# Altium PCB R45_PCBM.PcbDoc (part 5 of 8)
Units mm, origin at the board's own origin, x right, y up, seen from the top; angles counter-clockwise.
Board outline 109 x 109 mm, 4 copper layers (Top Layer, Layer 1, Layer 2, Bottom Layer), stack 0.98 mm thick; 9 components, 0 nets, 14 pads, 1504 vias.
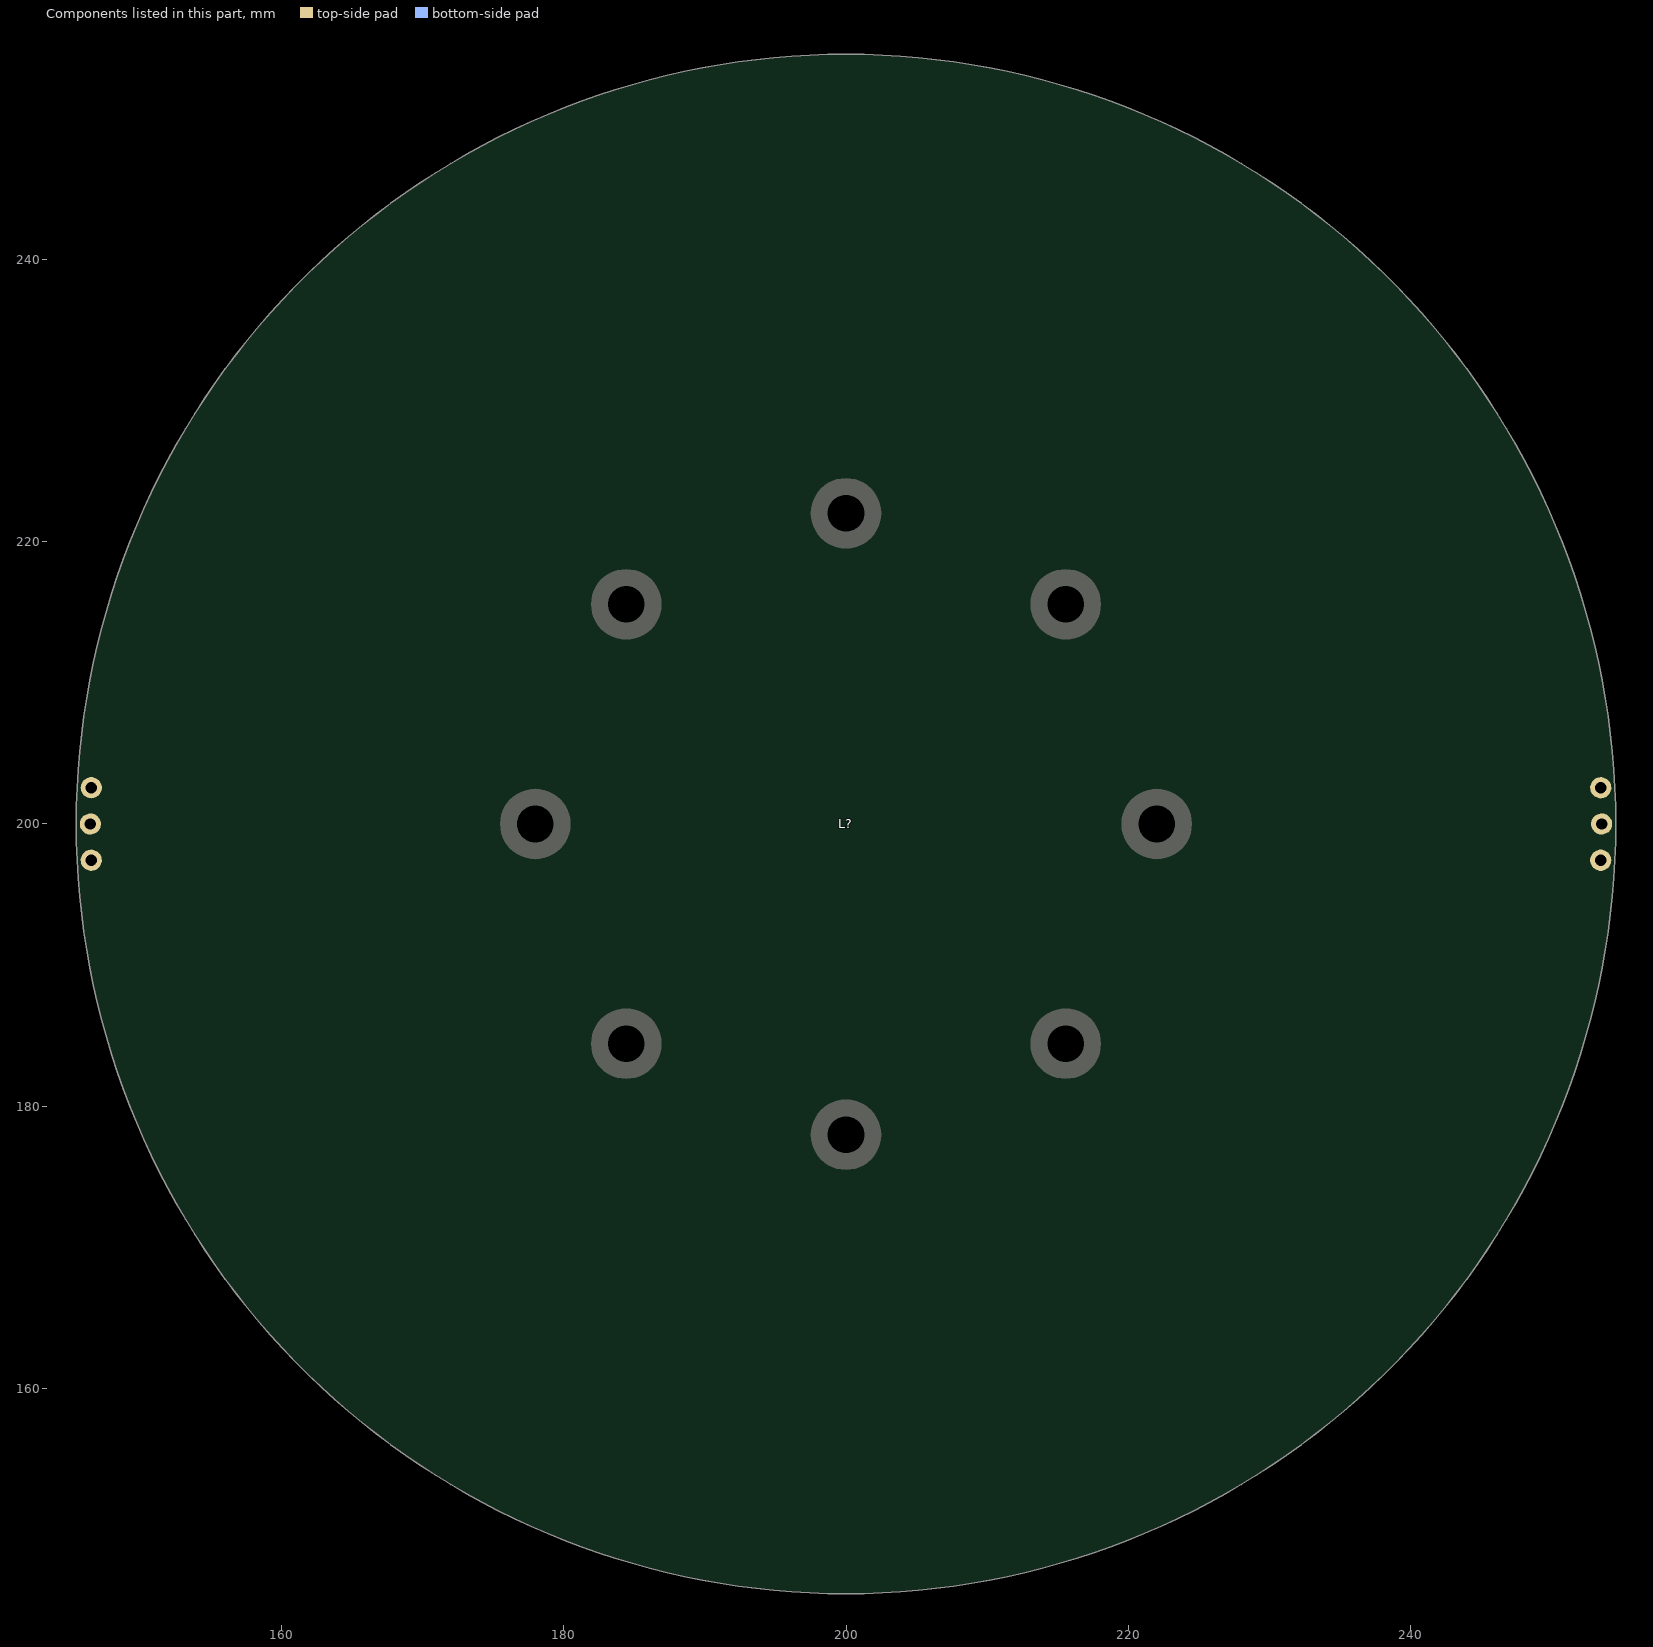
[diagram p7: the components of this part, seen from the top]

## Footprints (in the part's own frame and the unit in brackets; to place one, negate y for a bottom-side part, rotate by r counter-clockwise, add the part's x,y. Pads: shape width x height; smd on the part's side, far side on the other; paste and mask are expansions set on the pad) (continued)
R45_stator [mm] (continued)
  Layer 2 region: -33.629,35.508 -33.58,35.539 -33.522,35.549 -33.464,35.535 -33.416,35.501 -33.416,35.501 -18.566,19.566 -18.531,19.503 -18.529,19.43 -18.562,19.366 -18.562,19.366 -21.761,15.686 -21.82,15.645 -21.892,15.636 -21.96,15.662 -21.96,15.662 -37.424,26.484 -37.465,26.527 -37.486,26.582 -37.484,26.641 -37.46,26.695 -37.46,26.695 -36.964,27.377 -36.92,27.417 -36.865,27.437 -36.806,27.434 -36.752,27.409 -36.752,27.409 -23.3,17.266 -23.136,17.187 -22.954,17.176 -22.782,17.236 -22.647,17.358 -22.647,17.358 -22.494,17.493 -22.301,17.557 -22.098,17.541 -21.917,17.447 -21.917,17.447 -21.863,17.403 -21.724,17.341 -21.573,17.354 -21.447,17.44 -21.447,17.44 -20.255,18.812 -20.188,18.948 -20.195,19.099 -20.277,19.228 -20.277,19.228 -20.328,19.275 -20.446,19.441 -20.49,19.64 -20.453,19.841 -20.341,20.01 -20.341,20.01 -20.239,20.162 -20.204,20.34 -20.239,20.519 -20.34,20.67 -20.34,20.67 -33.499,33.821 -33.596,33.886 -33.711,33.909 -33.826,33.886 -33.923,33.821 -33.923,33.821 -35.599,32.053 -37.182,30.202 -37.182,30.202 -37.236,30.099 -37.247,29.982 -37.213,29.87 -37.138,29.78 -37.138,29.78 -22.798,18.161 -22.753,18.099 -22.744,18.023 -22.774,17.952 -22.774,17.952 -22.929,17.755 -22.99,17.708 -23.066,17.698 -23.137,17.727 -23.137,17.727 -38.799,29.523 -38.839,29.566 -38.858,29.622 -38.854,29.681 -38.828,29.734 -38.828,29.734 -36.344,32.724 -33.629,35.508
  Layer 2 region: -33.799,33.262 -33.75,33.295 -33.693,33.307 -33.635,33.296 -33.586,33.263 -33.586,33.263 -20.775,20.445 -20.736,20.378 -20.735,20.302 -20.773,20.234 -20.773,20.234 -20.947,20.054 -21.013,20.014 -21.09,20.012 -21.157,20.048 -21.157,20.048 -33.607,31.652 -33.707,31.713 -33.822,31.732 -33.936,31.705 -34.031,31.636 -34.031,31.636 -34.53,31.091 -35.02,30.538 -35.02,30.538 -35.079,30.436 -35.094,30.32 -35.063,30.207 -34.991,30.115 -34.991,30.115 -22.152,18.947 -22.101,18.918 -22.043,18.911 -21.987,18.926 -21.94,18.962 -21.94,18.962 -21.831,19.088 -21.802,19.139 -21.795,19.197 -21.81,19.253 -21.846,19.3 -21.846,19.3 -34.451,30.251 -34.487,30.298 -34.502,30.355 -34.494,30.413 -34.464,30.464 -34.464,30.464 -33.9,31.091 -33.852,31.126 -33.795,31.14 -33.736,31.131 -33.686,31.1 -33.686,31.1 -20.812,19.088 -20.771,19.024 -20.767,18.948 -20.801,18.88 -20.801,18.88 -21.591,17.971 -21.654,17.928 -21.73,17.921 -21.799,17.953 -21.799,17.953 -36.592,29.925 -36.629,29.97 -36.647,30.026 -36.641,30.085 -36.613,30.137 -36.613,30.137 -35.241,31.731 -33.799,33.262
  Layer 2 region: -1.184,45.983 -2.027,45.954 -2.084,45.94 -2.132,45.905 -2.163,45.854 -2.171,45.796 -2.171,45.796 -1.292,29.119 -1.269,29.046 -1.212,28.994 -1.137,28.977 -1.137,28.977 -0.887,28.985 -0.813,29.008 -0.76,29.063 -0.742,29.138 -0.742,29.138 -1.029,45.836 -1.041,45.894 -1.075,45.942 -1.125,45.973 -1.184,45.983
  Layer 2 region: -4.511,47.206 -4.452,47.2 -4.401,47.172 -4.364,47.126 -4.347,47.07 -4.347,47.07 -2.773,29.015 -2.786,28.94 -2.835,28.88 -2.906,28.853 -2.906,28.853 -3.156,28.827 -3.232,28.839 -3.292,28.886 -3.321,28.958 -3.321,28.958 -5.399,45.849 -5.436,45.96 -5.513,46.049 -5.617,46.101 -5.734,46.11 -5.734,46.11 -6.467,46.013 -7.198,45.904 -7.198,45.904 -7.308,45.864 -7.394,45.784 -7.443,45.678 -7.447,45.561 -7.447,45.561 -4.79,28.754 -4.77,28.699 -4.73,28.656 -4.677,28.631 -4.619,28.629 -4.619,28.629 -4.454,28.655 -4.399,28.675 -4.356,28.715 -4.332,28.768 -4.33,28.827 -4.33,28.827 -6.946,45.318 -6.944,45.377 -6.919,45.431 -6.875,45.47 -6.819,45.49 -6.819,45.49 -5.984,45.607 -5.925,45.604 -5.872,45.578 -5.833,45.533 -5.814,45.477 -5.814,45.477 -3.673,28 -3.683,27.925 -3.729,27.864 -3.799,27.834 -3.799,27.833 -4.988,27.645 -5.064,27.653 -5.126,27.696 -5.159,27.765 -5.159,27.765 -8.795,46.445 -8.795,46.503 -8.772,46.558 -8.73,46.599 -8.676,46.621 -8.676,46.621 -6.6,46.96 -4.511,47.206
  Layer 2 region: -2.938,48.817 -2.88,48.809 -2.829,48.779 -2.794,48.732 -2.779,48.675 -2.779,48.675 -1.645,26.922 -1.659,26.851 -1.705,26.795 -1.771,26.766 -1.771,26.766 -6.587,26.004 -6.659,26.01 -6.72,26.05 -6.755,26.113 -6.755,26.113 -11.645,44.344 -11.649,44.403 -11.63,44.459 -11.59,44.503 -11.537,44.528 -11.537,44.528 -10.718,44.732 -10.659,44.735 -10.604,44.714 -10.56,44.674 -10.536,44.62 -10.536,44.62 -6.751,28.203 -6.676,28.037 -6.543,27.913 -6.373,27.848 -6.191,27.854 -6.191,27.854 -5.987,27.859 -5.798,27.784 -5.652,27.642 -5.574,27.453 -5.574,27.453 -5.561,27.385 -5.495,27.248 -5.371,27.161 -5.22,27.146 -5.22,27.146 -3.424,27.43 -3.285,27.491 -3.194,27.612 -3.174,27.763 -3.174,27.763 -3.182,27.832 -3.166,28.035 -3.072,28.216 -2.915,28.346 -2.719,28.404 -2.719,28.404 -2.544,28.454 -2.402,28.568 -2.315,28.728 -2.295,28.909 -2.295,28.909 -3.922,47.441 -3.954,47.554 -4.028,47.645 -4.131,47.701 -4.247,47.714 -4.247,47.714 -6.667,47.436 -9.069,47.036 -9.069,47.036 -9.178,46.992 -9.261,46.91 -9.306,46.802 -9.307,46.684 -9.307,46.684 -5.79,28.566 -5.796,28.49 -5.838,28.426 -5.906,28.391 -5.906,28.391 -6.152,28.339 -6.229,28.343 -6.293,28.384 -6.329,28.452 -6.329,28.452 -10.745,47.555 -10.747,47.614 -10.726,47.669 -10.686,47.712 -10.632,47.736 -10.632,47.736 -6.806,48.429 -2.938,48.817
  Layer 2 region: 0.507,50.696 0.564,50.684 0.613,50.651 0.644,50.601 0.655,50.543 0.655,50.543 0.216,25.819 0.199,25.752 0.154,25.699 0.09,25.673 0.09,25.673 -8.019,24.389 -8.088,24.394 -8.147,24.43 -8.184,24.488 -8.184,24.488 -14.71,43.423 -14.718,43.482 -14.703,43.539 -14.666,43.586 -14.615,43.615 -14.615,43.615 -13.813,43.875 -13.754,43.882 -13.697,43.866 -13.651,43.829 -13.623,43.777 -13.623,43.777 -8.702,27.664 -8.615,27.503 -8.474,27.388 -8.3,27.336 -8.119,27.354 -8.119,27.354 -7.916,27.374 -7.722,27.312 -7.567,27.18 -7.476,26.998 -7.476,26.998 -7.136,25.726 -7.065,25.599 -6.943,25.52 -6.799,25.508 -6.799,25.508 -1.416,26.36 -1.283,26.417 -1.191,26.53 -1.164,26.672 -1.164,26.672 -1.233,27.986 -1.203,28.188 -1.096,28.362 -0.93,28.48 -0.731,28.524 -0.731,28.524 -0.553,28.563 -0.404,28.666 -0.305,28.82 -0.273,28.999 -0.273,28.999 -0.633,49.29 -0.658,49.404 -0.724,49.5 -0.823,49.564 -0.938,49.584 -0.938,49.584 -6.902,49.111 -12.765,47.922 -12.765,47.922 -12.87,47.871 -12.948,47.783 -12.985,47.672 -12.978,47.555 -12.978,47.555 -7.769,28.093 -7.769,28.016 -7.807,27.949 -7.873,27.91 -7.873,27.91 -8.114,27.841 -8.191,27.839 -8.258,27.876 -8.299,27.941 -8.299,27.941 -14.561,48.405 -14.567,48.463 -14.55,48.52 -14.513,48.565 -14.461,48.593 -14.461,48.593 -7.056,50.205 0.507,50.696
  Layer 2 region: -16.84,42.805 -17.622,42.489 -17.671,42.457 -17.704,42.407 -17.715,42.349 -17.703,42.291 -17.703,42.291 -11.174,26.921 -11.127,26.86 -11.056,26.831 -10.979,26.84 -10.979,26.84 -10.747,26.934 -10.685,26.98 -10.655,27.051 -10.663,27.127 -10.663,27.127 -16.643,42.72 -16.675,42.77 -16.724,42.804 -16.781,42.816 -16.84,42.805
  Layer 2 region: -20.384,42.816 -20.327,42.831 -20.269,42.822 -20.219,42.792 -20.184,42.744 -20.184,42.744 -12.529,26.317 -12.516,26.241 -12.541,26.169 -12.599,26.119 -12.599,26.119 -12.825,26.009 -12.9,25.994 -12.973,26.018 -13.024,26.076 -13.024,26.076 -20.755,41.237 -20.828,41.329 -20.93,41.386 -21.046,41.4 -21.159,41.368 -21.159,41.368 -21.814,41.026 -22.464,40.674 -22.464,40.674 -22.553,40.599 -22.607,40.494 -22.617,40.378 -22.581,40.266 -22.581,40.266 -14.336,25.381 -14.298,25.337 -14.246,25.31 -14.188,25.305 -14.132,25.323 -14.132,25.323 -13.986,25.404 -13.942,25.441 -13.915,25.493 -13.91,25.552 -13.928,25.607 -13.928,25.607 -22.027,40.209 -22.045,40.266 -22.04,40.325 -22.012,40.377 -21.966,40.414 -21.966,40.414 -21.222,40.81 -21.165,40.827 -21.106,40.821 -21.054,40.792 -21.018,40.746 -21.018,40.746 -13.028,25.055 -13.012,24.981 -13.034,24.908 -13.089,24.856 -13.089,24.856 -14.143,24.272 -14.216,24.253 -14.29,24.273 -14.344,24.326 -14.344,24.326 -24.15,40.635 -24.17,40.691 -24.167,40.749 -24.142,40.803 -24.098,40.842 -24.098,40.842 -22.263,41.87 -20.384,42.816
  Layer 2 region: -16.863,47.812 -16.805,47.82 -16.748,47.806 -16.701,47.77 -16.671,47.719 -16.671,47.719 -8.627,24.336 -8.62,24.267 -8.645,24.202 -8.696,24.156 -8.696,24.156 -15.877,20.175 -15.943,20.157 -16.011,20.17 -16.066,20.212 -16.066,20.212 -28.675,35.773 -28.702,35.826 -28.707,35.885 -28.689,35.941 -28.65,35.986 -28.65,35.986 -27.986,36.505 -27.933,36.532 -27.874,36.536 -27.818,36.517 -27.774,36.477 -27.774,36.477 -17.638,23.019 -17.503,22.898 -17.331,22.838 -17.149,22.848 -16.985,22.928 -16.985,22.928 -16.801,23.015 -16.597,23.024 -16.406,22.953 -16.259,22.813 -16.259,22.813 -15.504,21.734 -15.395,21.639 -15.253,21.606 -15.113,21.644 -15.113,21.644 -10.346,24.286 -10.24,24.385 -10.193,24.522 -10.216,24.666 -10.216,24.666 -10.73,25.877 -10.771,26.077 -10.73,26.276 -10.615,26.444 -10.443,26.554 -10.443,26.554 -10.289,26.651 -10.184,26.8 -10.144,26.977 -10.175,27.157 -10.175,27.157 -17.453,46.101 -17.515,46.2 -17.611,46.267 -17.725,46.293 -17.841,46.273 -17.841,46.273 -23.283,43.788 -28.386,40.666 -28.386,40.666 -28.467,40.582 -28.51,40.473 -28.507,40.355 -28.46,40.248 -28.46,40.248 -16.909,23.742 -16.882,23.669 -16.895,23.594 -16.944,23.534 -16.944,23.534 -17.147,23.387 -17.218,23.359 -17.294,23.37 -17.354,23.418 -17.354,23.418 -30.239,40.505 -30.264,40.558 -30.267,40.617 -30.248,40.673 -30.208,40.716 -30.208,40.716 -23.802,44.764 -16.863,47.812
  Layer 2 region: -19.457,44.868 -19.399,44.88 -19.342,44.87 -19.292,44.838 -19.259,44.789 -19.259,44.789 -10.754,24.736 -10.743,24.664 -10.766,24.596 -10.819,24.546 -10.819,24.546 -15.083,22.183 -15.153,22.164 -15.224,22.18 -15.279,22.228 -15.279,22.228 -26.109,37.687 -26.133,37.741 -26.134,37.8 -26.112,37.855 -26.07,37.897 -26.07,37.897 -25.371,38.369 -25.317,38.391 -25.257,38.391 -25.203,38.368 -25.162,38.326 -25.162,38.326 -15.99,24.194 -15.863,24.063 -15.695,23.991 -15.513,23.989 -15.344,24.056 -15.344,24.056 -15.155,24.131 -14.951,24.126 -14.765,24.041 -14.628,23.891 -14.628,23.891 -14.592,23.831 -14.483,23.725 -14.336,23.686 -14.189,23.723 -14.189,23.723 -12.599,24.605 -12.49,24.71 -12.445,24.855 -12.478,25.003 -12.478,25.003 -12.509,25.065 -12.564,25.262 -12.537,25.464 -12.434,25.639 -12.27,25.761 -12.27,25.761 -12.123,25.868 -12.029,26.024 -12.001,26.204 -12.044,26.381 -12.044,26.381 -19.911,43.239 -19.98,43.333 -20.081,43.394 -20.196,43.412 -20.31,43.384 -20.31,43.384 -22.489,42.295 -24.61,41.098 -24.61,41.098 -24.696,41.019 -24.746,40.913 -24.752,40.796 -24.713,40.686 -24.713,40.686 -15.211,24.863 -15.19,24.789 -15.208,24.715 -15.261,24.659 -15.261,24.659 -15.473,24.526 -15.547,24.503 -15.622,24.52 -15.679,24.571 -15.679,24.571 -26.362,41.012 -26.384,41.067 -26.383,41.126 -26.36,41.18 -26.317,41.22 -26.317,41.22 -22.96,43.181 -19.457,44.868
  Layer 2 region: 21.222,-40.81 21.966,-40.414 22.012,-40.377 22.04,-40.325 22.045,-40.266 22.027,-40.209 22.027,-40.209 13.926,-25.605 13.873,-25.55 13.8,-25.528 13.725,-25.545 13.725,-25.545 13.503,-25.663 13.447,-25.715 13.424,-25.789 13.44,-25.864 13.44,-25.864 21.018,-40.746 21.054,-40.792 21.106,-40.821 21.165,-40.827 21.222,-40.81
  Layer 2 region: 20.384,-42.816 22.263,-41.87 24.098,-40.842 24.098,-40.842 24.142,-40.803 24.167,-40.749 24.17,-40.691 24.15,-40.635 24.15,-40.635 14.812,-25.103 14.756,-25.05 14.682,-25.031 14.608,-25.051 14.608,-25.051 14.391,-25.176 14.336,-25.231 14.316,-25.304 14.334,-25.379 14.334,-25.379 22.581,-40.266 22.617,-40.378 22.607,-40.494 22.553,-40.599 22.464,-40.674 22.464,-40.674 21.814,-41.026 21.159,-41.368 21.159,-41.368 21.046,-41.4 20.93,-41.386 20.828,-41.329 20.755,-41.237 20.755,-41.237 12.889,-25.81 12.856,-25.661 12.901,-25.516 13.011,-25.411 13.011,-25.411 14.655,-24.499 14.802,-24.462 14.949,-24.501 15.058,-24.607 15.058,-24.607 23.809,-39.181 23.849,-39.224 23.902,-39.249 23.961,-39.251 24.017,-39.231 24.017,-39.231 24.732,-38.784 24.775,-38.743 24.799,-38.689 24.8,-38.63 24.778,-38.575 24.778,-38.575 14.95,-23.45 14.896,-23.4 14.824,-23.382 14.752,-23.401 14.752,-23.401 12.028,-24.911 11.974,-24.962 11.951,-25.032 11.965,-25.105 11.965,-25.105 20.184,-42.744 20.219,-42.792 20.269,-42.822 20.327,-42.831 20.384,-42.816
  Layer 2 region: 18.323,-42.191 19.094,-41.848 19.142,-41.814 19.173,-41.764 19.182,-41.705 19.169,-41.648 19.169,-41.648 12.106,-26.514 12.057,-26.455 11.985,-26.428 11.909,-26.441 11.909,-26.441 11.68,-26.543 11.62,-26.591 11.592,-26.662 11.603,-26.738 11.603,-26.738 18.124,-42.113 18.158,-42.162 18.207,-42.194 18.265,-42.204 18.323,-42.191
  Layer 2 region: 16.863,-47.812 16.805,-47.82 16.748,-47.806 16.701,-47.77 16.671,-47.719 16.671,-47.719 9.71,-27.483 9.704,-27.406 9.737,-27.337 9.8,-27.293 9.8,-27.293 10.036,-27.207 10.113,-27.2 10.182,-27.232 10.227,-27.294 10.227,-27.294 17.453,-46.101 17.515,-46.2 17.611,-46.267 17.725,-46.293 17.841,-46.273 17.841,-46.273 23.283,-43.788 28.386,-40.666 28.386,-40.666 28.467,-40.582 28.51,-40.473 28.507,-40.355 28.46,-40.248 28.46,-40.248 16.824,-23.621 16.693,-23.495 16.523,-23.429 16.341,-23.433 16.174,-23.506 16.174,-23.506 15.987,-23.588 15.784,-23.589 15.595,-23.511 15.453,-23.366 15.453,-23.366 15.187,-22.956 15.077,-22.856 14.933,-22.82 14.79,-22.857 14.79,-22.857 11.547,-24.655 11.439,-24.757 11.393,-24.898 11.42,-25.044 11.42,-25.044 11.627,-25.487 11.675,-25.685 11.641,-25.886 11.531,-26.058 11.363,-26.173 11.363,-26.173 11.213,-26.276 11.113,-26.428 11.079,-26.607 11.116,-26.785 11.116,-26.785 18.439,-44.023 18.505,-44.119 18.603,-44.184 18.718,-44.205 18.833,-44.181 18.833,-44.181 22.548,-42.406 26.097,-40.319 26.097,-40.319 26.181,-40.237 26.227,-40.13 26.229,-40.012 26.186,-39.904 26.186,-39.904 16.07,-24.317 16.046,-24.244 16.061,-24.169 16.112,-24.111 16.112,-24.111 16.32,-23.971 16.392,-23.946 16.468,-23.96 16.527,-24.009 16.527,-24.009 27.876,-40.208 27.9,-40.262 27.901,-40.321 27.879,-40.375 27.838,-40.418 27.838,-40.418 23.04,-43.332 17.941,-45.68 17.941,-45.68 17.883,-45.691 17.825,-45.678 17.777,-45.644 17.746,-45.594 17.746,-45.594 9.752,-24.752 9.743,-24.682 9.767,-24.615 9.819,-24.567 9.819,-24.567 15.631,-21.346 15.699,-21.327 15.768,-21.342 15.823,-21.387 15.823,-21.387 30.239,-40.505 30.264,-40.558 30.267,-40.617 30.248,-40.673 30.208,-40.716 30.208,-40.716 23.802,-44.764 16.863,-47.812
  Layer 2 region: 27.986,-36.505 27.933,-36.532 27.874,-36.536 27.818,-36.517 27.774,-36.477 27.774,-36.477 17.727,-23.137 17.698,-23.066 17.708,-22.99 17.755,-22.929 17.755,-22.929 17.952,-22.774 18.023,-22.744 18.099,-22.753 18.161,-22.798 18.161,-22.798 28.675,-35.773 28.702,-35.826 28.707,-35.885 28.689,-35.941 28.65,-35.986 28.65,-35.986
  Layer 2 region: 33.9,-31.091 34.464,-30.464 34.494,-30.413 34.502,-30.355 34.487,-30.298 34.451,-30.251 34.451,-30.251 21.844,-19.298 21.775,-19.264 21.698,-19.269 21.634,-19.311 21.634,-19.311 21.466,-19.497 21.431,-19.565 21.435,-19.642 21.475,-19.707 21.475,-19.707 33.686,-31.1 33.736,-31.131 33.795,-31.14 33.852,-31.126 33.9,-31.091
  Layer 2 region: 33.799,-33.262 35.241,-31.731 36.613,-30.137 36.613,-30.137 36.641,-30.085 36.647,-30.026 36.629,-29.97 36.592,-29.925 36.592,-29.925 22.504,-18.524 22.434,-18.492 22.358,-18.5 22.295,-18.544 22.295,-18.544 22.134,-18.736 22.101,-18.806 22.107,-18.882 22.15,-18.946 22.15,-18.946 34.991,-30.115 35.063,-30.207 35.094,-30.32 35.079,-30.436 35.02,-30.538 35.02,-30.538 34.53,-31.091 34.031,-31.636 34.031,-31.636 33.936,-31.705 33.822,-31.732 33.707,-31.713 33.607,-31.652 33.607,-31.652 20.939,-19.845 20.858,-19.716 20.85,-19.565 20.917,-19.429 20.917,-19.429 22.151,-18.009 22.276,-17.924 22.427,-17.911 22.566,-17.973 22.566,-17.973 35.773,-28.675 35.826,-28.702 35.885,-28.707 35.941,-28.689 35.986,-28.65 35.986,-28.65 36.505,-27.986 36.532,-27.933 36.536,-27.874 36.517,-27.818 36.477,-27.774 36.477,-27.774 22.069,-16.923 22.001,-16.894 21.927,-16.902 21.866,-16.944 21.866,-16.944 19.822,-19.295 19.789,-19.361 19.792,-19.435 19.829,-19.499 19.829,-19.499 33.586,-33.263 33.635,-33.296 33.693,-33.307 33.75,-33.295 33.799,-33.262
  Layer 2 region: 31.648,-33.38 32.255,-32.794 32.289,-32.745 32.301,-32.688 32.29,-32.629 32.257,-32.58 32.257,-32.58 20.445,-20.775 20.378,-20.736 20.302,-20.735 20.234,-20.773 20.234,-20.773 20.054,-20.947 20.014,-21.013 20.012,-21.09 20.048,-21.157 20.048,-21.157 31.435,-33.374 31.483,-33.409 31.54,-33.422 31.599,-33.412 31.648,-33.38
  Layer 2 region: 32.199,-39.161 32.147,-39.189 32.088,-39.194 32.032,-39.177 31.987,-39.139 31.987,-39.139 18.524,-22.504 18.492,-22.434 18.5,-22.358 18.544,-22.295 18.544,-22.295 18.736,-22.134 18.806,-22.101 18.882,-22.107 18.946,-22.15 18.946,-22.15 32.168,-37.351 32.26,-37.423 32.373,-37.454 32.489,-37.439 32.591,-37.381 32.591,-37.381 36.855,-33.184 40.583,-28.505 40.583,-28.505 40.63,-28.398 40.633,-28.281 40.59,-28.172 40.509,-28.087 40.509,-28.087 23.888,-16.442 23.722,-16.369 23.54,-16.365 23.37,-16.431 23.239,-16.557 23.239,-16.557 23.091,-16.697 22.9,-16.768 22.696,-16.76 22.512,-16.672 22.512,-16.672 22.122,-16.378 21.985,-16.32 21.838,-16.336 21.715,-16.42 21.715,-16.42 19.283,-19.219 19.216,-19.351 19.221,-19.5 19.297,-19.628 19.297,-19.628 19.643,-19.973 19.755,-20.143 19.792,-20.343 19.748,-20.542 19.63,-20.708 19.63,-20.708 19.523,-20.856 19.482,-21.033 19.511,-21.213 19.607,-21.368 19.607,-21.368 32.383,-35.061 32.478,-35.13 32.593,-35.156 32.708,-35.137 32.808,-35.076 32.808,-35.076 35.691,-32.137 38.313,-28.962 38.313,-28.962 38.364,-28.856 38.371,-28.739 38.332,-28.629 38.254,-28.541 38.254,-28.541 23.418,-17.354 23.37,-17.294 23.359,-17.218 23.387,-17.147 23.387,-17.147 23.534,-16.944 23.594,-16.895 23.669,-16.882 23.742,-16.909 23.742,-16.909 39.947,-28.249 39.987,-28.292 40.009,-28.346 40.007,-28.405 39.983,-28.459 39.983,-28.459 36.471,-32.839 32.482,-36.789 32.482,-36.789 32.431,-36.819 32.373,-36.826 32.316,-36.811 32.27,-36.775 32.27,-36.775 17.63,-19.924 17.597,-19.861 17.597,-19.79 17.63,-19.727 17.63,-19.727 21.989,-14.713 22.047,-14.672 22.117,-14.662 22.184,-14.685 22.184,-14.685 42.269,-27.72 42.311,-27.762 42.334,-27.816 42.334,-27.874 42.312,-27.929 42.312,-27.929 37.676,-33.924 32.199,-39.161
  Layer 2 region: 38.784,-24.732 38.743,-24.775 38.689,-24.799 38.63,-24.8 38.575,-24.778 38.575,-24.778 24.571,-15.679 24.52,-15.622 24.503,-15.547 24.526,-15.473 24.526,-15.473 24.659,-15.261 24.715,-15.208 24.789,-15.19 24.863,-15.211 24.863,-15.211 39.181,-23.809 39.224,-23.849 39.249,-23.902 39.251,-23.961 39.231,-24.017 39.231,-24.017
  Layer 2 region: 5.984,-45.607 6.819,-45.49 6.875,-45.47 6.919,-45.431 6.944,-45.377 6.946,-45.318 6.946,-45.318 4.329,-28.824 4.298,-28.754 4.236,-28.708 4.16,-28.699 4.16,-28.699 3.912,-28.734 3.841,-28.764 3.794,-28.825 3.784,-28.901 3.784,-28.901 5.814,-45.477 5.833,-45.533 5.872,-45.578 5.925,-45.604 5.984,-45.607
  Layer 2 region: 4.511,-47.206 6.6,-46.96 8.676,-46.621 8.676,-46.621 8.73,-46.599 8.772,-46.558 8.795,-46.503 8.795,-46.445 8.795,-46.445 5.332,-28.655 5.299,-28.586 5.236,-28.543 5.159,-28.536 5.159,-28.536 4.912,-28.58 4.842,-28.612 4.798,-28.675 4.79,-28.751 4.79,-28.751 7.447,-45.561 7.443,-45.678 7.394,-45.784 7.308,-45.864 7.198,-45.904 7.198,-45.904 6.467,-46.013 5.734,-46.11 5.734,-46.11 5.617,-46.101 5.513,-46.049 5.436,-45.96 5.399,-45.849 5.399,-45.849 3.284,-28.661 3.304,-28.511 3.396,-28.389 3.535,-28.328 3.535,-28.328 5.392,-28.034 5.543,-28.049 5.668,-28.136 5.733,-28.273 5.733,-28.273 8.972,-44.961 8.995,-45.016 9.037,-45.057 9.092,-45.08 9.151,-45.079 9.151,-45.079 9.976,-44.904 10.03,-44.88 10.071,-44.837 10.092,-44.782 10.091,-44.723 10.091,-44.723 6.028,-27.149 5.994,-27.083 5.932,-27.042 5.859,-27.035 5.859,-27.035 2.782,-27.522 2.714,-27.552 2.669,-27.61 2.657,-27.683 2.657,-27.683 4.347,-47.07 4.364,-47.126 4.401,-47.172 4.452,-47.2 4.511,-47.206
  Layer 2 region: -0.507,-50.696 -0.564,-50.684 -0.613,-50.651 -0.644,-50.601 -0.655,-50.543 -0.655,-50.543 -0.275,-29.146 -0.254,-29.072 -0.2,-29.018 -0.125,-28.999 -0.125,-28.999 0.125,-28.999 0.2,-29.018 0.254,-29.072 0.275,-29.146 0.275,-29.146 0.633,-49.29 0.658,-49.404 0.724,-49.5 0.823,-49.564 0.938,-49.584 0.938,-49.584 6.902,-49.111 12.765,-47.922 12.765,-47.922 12.87,-47.871 12.948,-47.783 12.985,-47.672 12.978,-47.555 12.978,-47.555 7.731,-27.951 7.65,-27.787 7.513,-27.667 7.341,-27.609 7.159,-27.621 7.159,-27.621 6.956,-27.633 6.764,-27.565 6.613,-27.427 6.529,-27.242 6.529,-27.242 6.419,-26.766 6.351,-26.634 6.228,-26.551 6.08,-26.537 6.08,-26.537 2.418,-27.117 2.282,-27.176 2.19,-27.293 2.166,-27.44 2.166,-27.44 2.209,-27.926 2.186,-28.129 2.085,-28.306 1.924,-28.43 1.726,-28.481 1.726,-28.481 1.55,-28.526 1.404,-28.635 1.311,-28.791 1.285,-28.972 1.285,-28.972 2.27,-47.674 2.299,-47.788 2.369,-47.881 2.47,-47.941 2.586,-47.958 2.586,-47.958 6.684,-47.56 10.733,-46.813 10.733,-46.813 10.84,-46.765 10.92,-46.68 10.962,-46.57 10.959,-46.453 10.959,-46.453 6.784,-28.347 6.786,-28.27 6.826,-28.205 6.894,-28.168 6.894,-28.168 7.137,-28.107 7.214,-28.108 7.28,-28.147 7.318,-28.214 7.318,-28.214 12.443,-47.317 12.447,-47.376 12.428,-47.432 12.389,-47.476 12.336,-47.501 12.336,-47.501 6.83,-48.599 1.235,-49.061 1.235,-49.061 1.177,-49.051 1.128,-49.02 1.094,-48.972 1.082,-48.914 1.082,-48.914 0.698,-26.595 0.714,-26.526 0.759,-26.471 0.825,-26.444 0.825,-26.444 7.387,-25.405 7.458,-25.41 7.518,-25.448 7.554,-25.509 7.554,-25.509 14.561,-48.405 14.567,-48.463 14.55,-48.52 14.513,-48.565 14.461,-48.593 14.461,-48.593 7.056,-50.205 -0.507,-50.696
  Layer 2 region: 13.813,-43.875 13.754,-43.882 13.697,-43.866 13.651,-43.829 13.623,-43.777 13.623,-43.777 8.745,-27.805 8.742,-27.728 8.777,-27.66 8.842,-27.618 8.842,-27.618 9.08,-27.541 9.157,-27.536 9.226,-27.571 9.269,-27.634 9.269,-27.634 14.71,-43.423 14.718,-43.482 14.703,-43.539 14.666,-43.586 14.615,-43.615 14.615,-43.615
  Layer 2 region: 2.788,-45.914 3.629,-45.855 3.686,-45.839 3.733,-45.803 3.762,-45.751 3.768,-45.692 3.768,-45.692 2.308,-29.056 2.282,-28.984 2.223,-28.934 2.148,-28.919 2.148,-28.919 1.898,-28.937 1.825,-28.962 1.774,-29.019 1.758,-29.094 1.758,-29.094 2.628,-45.772 2.642,-45.829 2.678,-45.876 2.729,-45.906 2.788,-45.914
  Layer 2 region: 40.414,-21.966 40.81,-21.222 40.827,-21.165 40.821,-21.106 40.792,-21.054 40.746,-21.018 40.746,-21.018 25.864,-13.44 25.789,-13.424 25.715,-13.447 25.663,-13.503 25.663,-13.503 25.545,-13.725 25.528,-13.8 25.55,-13.873 25.605,-13.926 25.605,-13.926 40.209,-22.027 40.266,-22.045 40.325,-22.04 40.377,-22.012 40.414,-21.966
  Layer 2 region: 41.848,-19.094 42.191,-18.323 42.204,-18.265 42.194,-18.207 42.162,-18.158 42.113,-18.124 42.113,-18.124 26.738,-11.603 26.662,-11.592 26.591,-11.62 26.543,-11.68 26.543,-11.68 26.441,-11.909 26.428,-11.985 26.455,-12.057 26.514,-12.106 26.514,-12.106 41.648,-19.169 41.705,-19.182 41.764,-19.173 41.814,-19.142 41.848,-19.094
  Layer 2 region: 42.805,-16.84 42.816,-16.781 42.804,-16.724 42.77,-16.675 42.72,-16.643 42.72,-16.643 27.129,-10.664 27.08,-10.633 27.046,-10.585 27.033,-10.528 27.043,-10.47 27.043,-10.47 27.103,-10.315 27.134,-10.265 27.182,-10.231 27.239,-10.218 27.297,-10.228 27.297,-10.228 42.884,-16.217 42.942,-16.227 43,-16.213 43.047,-16.178 43.078,-16.128 43.078,-16.128 43.367,-15.335 43.376,-15.277 43.361,-15.22 43.326,-15.172 43.275,-15.142 43.275,-15.142 26.624,-9.414 26.549,-9.409 26.48,-9.441 26.435,-9.503 26.435,-9.503 26.004,-10.627 25.995,-10.703 26.025,-10.772 26.085,-10.819 26.085,-10.819 42.291,-17.703 42.349,-17.715 42.407,-17.704 42.457,-17.671 42.489,-17.622 42.489,-17.622
  Layer 2 region: 41.156,-20.542 41.526,-19.785 41.541,-19.727 41.533,-19.669 41.502,-19.618 41.455,-19.583 41.455,-19.583 26.183,-12.467 26.037,-12.359 25.942,-12.204 25.915,-12.024 25.958,-11.847 25.958,-11.847 26.005,-11.649 25.972,-11.448 25.862,-11.276 25.694,-11.16 25.694,-11.16 25.63,-11.133 25.51,-11.04 25.451,-10.9 25.467,-10.749 25.467,-10.749 26.119,-9.053 26.207,-8.929 26.345,-8.865 26.497,-8.876 26.497,-8.876 26.562,-8.899 26.764,-8.926 26.961,-8.871 27.12,-8.744 27.217,-8.565 27.217,-8.565 27.304,-8.405 27.445,-8.29 27.619,-8.237 27.8,-8.255 27.8,-8.255 43.91,-13.186 43.969,-13.192 44.026,-13.174 44.071,-13.136 44.098,-13.084 44.098,-13.084 44.331,-12.273 44.336,-12.214 44.317,-12.158 44.278,-12.113 44.225,-12.087 44.225,-12.087 25.992,-7.207 25.92,-7.205 25.855,-7.238 25.813,-7.298 25.813,-7.298 24.066,-11.849 24.057,-11.921 24.083,-11.989 24.138,-12.036 24.138,-12.036 40.954,-20.61 41.01,-20.626 41.069,-20.619 41.121,-20.59 41.156,-20.542
  Layer 2 region: 39.623,-23.363 40.045,-22.633 40.064,-22.577 40.06,-22.518 40.033,-22.465 39.988,-22.427 39.988,-22.427 25.25,-14.263 25.111,-14.145 25.028,-13.984 25.013,-13.802 25.068,-13.629 25.068,-13.629 25.13,-13.434 25.11,-13.231 25.013,-13.052 24.853,-12.926 24.853,-12.926 23.681,-12.328 23.571,-12.233 23.519,-12.098 23.537,-11.954 23.537,-11.954 25.49,-6.866 25.573,-6.747 25.702,-6.681 25.847,-6.684 25.847,-6.684 27.118,-7.025 27.322,-7.037 27.514,-6.969 27.664,-6.831 27.749,-6.646 27.749,-6.646 27.823,-6.48 27.956,-6.355 28.126,-6.29 28.308,-6.296 28.308,-6.296 44.723,-10.091 44.782,-10.092 44.837,-10.071 44.88,-10.03 44.904,-9.976 44.904,-9.976 45.079,-9.151 45.08,-9.092 45.057,-9.037 45.016,-8.995 44.961,-8.972 44.961,-8.972 25.3,-5.156 25.23,-5.159 25.17,-5.193 25.131,-5.25 25.131,-5.25 22.189,-12.914 22.179,-12.983 22.202,-13.048 22.251,-13.097 22.251,-13.097 39.416,-23.417 39.472,-23.437 39.531,-23.434 39.584,-23.408 39.623,-23.363
  Layer 2 region: 43.615,-14.615 43.875,-13.813 43.882,-13.754 43.866,-13.697 43.829,-13.651 43.777,-13.623 43.777,-13.623 27.805,-8.745 27.728,-8.742 27.66,-8.777 27.618,-8.842 27.618,-8.842 27.541,-9.08 27.536,-9.157 27.571,-9.226 27.634,-9.269 27.634,-9.269 43.423,-14.71 43.482,-14.718 43.539,-14.703 43.586,-14.666 43.615,-14.615
  Layer 2 region: 44.528,-11.537 44.732,-10.718 44.735,-10.659 44.714,-10.604 44.674,-10.56 44.62,-10.536 44.62,-10.536 28.347,-6.784 28.27,-6.786 28.205,-6.826 28.168,-6.894 28.168,-6.894 28.107,-7.137 28.108,-7.214 28.147,-7.28 28.214,-7.318 28.214,-7.318 44.344,-11.645 44.403,-11.649 44.459,-11.63 44.503,-11.59 44.528,-11.537
  Layer 2 region: 45.49,-6.819 45.607,-5.984 45.604,-5.925 45.578,-5.872 45.533,-5.833 45.477,-5.814 45.477,-5.814 28.901,-3.784 28.825,-3.794 28.764,-3.841 28.734,-3.912 28.734,-3.912 28.699,-4.16 28.708,-4.236 28.754,-4.298 28.824,-4.329 28.824,-4.329 45.318,-6.946 45.377,-6.944 45.431,-6.919 45.47,-6.875 45.49,-6.819
  Layer 2 region: 45.855,-3.629 45.914,-2.788 45.906,-2.729 45.876,-2.678 45.829,-2.642 45.772,-2.628 45.772,-2.628 29.094,-1.758 29.019,-1.774 28.962,-1.825 28.937,-1.898 28.937,-1.898 28.919,-2.148 28.934,-2.223 28.984,-2.282 29.056,-2.308 29.056,-2.308 45.692,-3.768 45.751,-3.762 45.803,-3.733 45.839,-3.686 45.855,-3.629
  Layer 2 region: 45.224,-8.402 45.371,-7.572 45.369,-7.513 45.345,-7.459 45.302,-7.418 45.247,-7.398 45.247,-7.398 28.606,-4.767 28.435,-4.704 28.301,-4.58 28.225,-4.415 28.218,-4.233 28.218,-4.233 28.209,-4.029 28.121,-3.845 27.968,-3.71 27.775,-3.646 27.775,-3.646 26.469,-3.486 26.333,-3.434 26.238,-3.324 26.206,-3.183 26.206,-3.183 26.301,2.266 26.338,2.406 26.437,2.513 26.575,2.56 26.575,2.56 27.886,2.674 28.081,2.732 28.238,2.862 28.332,3.042 28.348,3.246 28.348,3.246 28.362,3.427 28.444,3.59 28.582,3.709 28.754,3.766 28.754,3.766 45.477,5.814 45.533,5.833 45.578,5.872 45.604,5.925 45.607,5.984 45.607,5.984 45.49,6.819 45.47,6.875 45.431,6.919 45.377,6.944 45.318,6.946 45.318,6.946 25.537,3.808 25.473,3.781 25.428,3.729 25.411,3.662 25.411,3.662 25.268,-4.547 25.282,-4.614 25.326,-4.668 25.389,-4.697 25.389,-4.697 45.048,-8.524 45.107,-8.523 45.162,-8.5 45.203,-8.458 45.224,-8.402
  Layer 2 region: 45.7,-5.227 45.789,-4.389 45.783,-4.33 45.755,-4.277 45.709,-4.24 45.652,-4.223 45.652,-4.223 28.868,-2.76 28.694,-2.709 28.552,-2.595 28.464,-2.435 28.444,-2.254 28.444,-2.254 28.421,-2.052 28.321,-1.874 28.159,-1.75 27.962,-1.699 27.962,-1.699 27.892,-1.696 27.748,-1.65 27.644,-1.539 27.608,-1.391 27.608,-1.391 27.64,0.427 27.681,0.573 27.788,0.68 27.935,0.721 27.935,0.721 28.004,0.722 28.203,0.766 28.369,0.885 28.475,1.059 28.506,1.26 28.506,1.26 28.532,1.44 28.625,1.597 28.771,1.706 28.947,1.751 28.947,1.751 45.772,2.628 45.829,2.642 45.876,2.678 45.906,2.729 45.914,2.788 45.914,2.788 45.855,3.629 45.839,3.686 45.803,3.733 45.751,3.762 45.692,3.768 45.692,3.768 26.889,2.118 26.821,2.094 26.771,2.041 26.753,1.971 26.753,1.971 26.667,-2.903 26.684,-2.974 26.731,-3.029 26.799,-3.055 26.799,-3.055 45.533,-5.36 45.592,-5.356 45.645,-5.329 45.683,-5.284 45.7,-5.227
  Layer 2 region: 45.983,-1.184 45.973,-1.125 45.942,-1.075 45.894,-1.041 45.836,-1.029 45.836,-1.029 29.141,-0.742 29.083,-0.73 29.035,-0.696 29.004,-0.647 28.993,-0.589 28.993,-0.589 28.996,-0.423 29.009,-0.366 29.042,-0.318 29.091,-0.286 29.149,-0.275 29.149,-0.275 45.844,-0.572 45.902,-0.561 45.952,-0.529 45.985,-0.48 45.996,-0.422 45.996,-0.422 45.996,0.422 45.985,0.48 45.952,0.529 45.902,0.561 45.844,0.572 45.844,0.572 28.239,0.259 28.165,0.239 28.112,0.185 28.091,0.112 28.091,0.112 28.07,-1.092 28.088,-1.166 28.14,-1.222 28.212,-1.245 28.212,-1.245 45.796,-2.171 45.854,-2.163 45.905,-2.132 45.94,-2.084 45.954,-2.027 45.954,-2.027
  Layer 2 region: 45.983,1.184 45.954,2.027 45.94,2.084 45.905,2.132 45.854,2.163 45.796,2.171 45.796,2.171 29.119,1.292 29.046,1.269 28.994,1.212 28.977,1.137 28.977,1.137 28.985,0.887 29.008,0.813 29.063,0.76 29.138,0.742 29.138,0.742 45.836,1.029 45.894,1.041 45.942,1.075 45.973,1.125 45.983,1.184
  Layer 2 region: 45.789,4.389 45.7,5.227 45.683,5.284 45.645,5.329 45.592,5.356 45.533,5.36 45.533,5.36 28.958,3.321 28.886,3.292 28.839,3.232 28.827,3.156 28.827,3.156 28.853,2.906 28.88,2.835 28.94,2.786 29.015,2.773 29.015,2.773 45.652,4.223 45.709,4.24 45.755,4.277 45.783,4.33 45.789,4.389
  Layer 2 region: 45.371,7.572 45.224,8.402 45.203,8.458 45.162,8.5 45.107,8.523 45.048,8.524 45.048,8.524 28.511,5.304 28.329,5.305 28.161,5.376 28.033,5.505 27.964,5.673 27.964,5.673 27.886,5.862 27.74,6.005 27.551,6.079 27.347,6.074 27.347,6.074 26.065,5.777 25.92,5.78 25.793,5.85 25.714,5.972 25.714,5.972 23.939,11.125 23.927,11.269 23.984,11.403 24.096,11.494 24.096,11.494 25.289,12.05 25.453,12.171 25.557,12.347 25.583,12.549 25.529,12.745 25.529,12.745 25.479,12.921 25.5,13.102 25.589,13.26 25.732,13.373 25.732,13.373 40.746,21.018 40.792,21.054 40.821,21.106 40.827,21.165 40.81,21.222 40.81,21.222 40.414,21.966 40.377,22.012 40.325,22.04 40.266,22.045 40.209,22.027 40.209,22.027 22.695,12.312 22.644,12.266 22.619,12.201 22.626,12.132 22.626,12.132 25.299,4.37 25.336,4.311 25.395,4.275 25.464,4.27 25.464,4.27 45.247,7.398 45.302,7.418 45.345,7.459 45.369,7.513 45.371,7.572
  Layer 2 region: 45.079,9.151 44.904,9.976 44.88,10.03 44.837,10.071 44.782,10.092 44.723,10.091 44.723,10.091 28.452,6.329 28.384,6.293 28.343,6.229 28.339,6.152 28.339,6.152 28.391,5.906 28.426,5.838 28.49,5.796 28.566,5.79 28.566,5.79 44.961,8.972 45.016,8.995 45.057,9.037 45.08,9.092 45.079,9.151
  Layer 2 region: 44.732,10.718 44.528,11.537 44.503,11.59 44.459,11.63 44.403,11.649 44.344,11.645 44.344,11.645 28.071,7.28 27.89,7.268 27.717,7.327 27.58,7.447 27.5,7.61 27.5,7.61 27.409,7.793 27.254,7.925 27.06,7.986 26.857,7.967 26.857,7.967 26.79,7.946 26.638,7.94 26.503,8.009 26.419,8.136 26.419,8.136 25.827,9.854 25.815,10.006 25.88,10.143 26.003,10.232 26.003,10.232 26.068,10.257 26.24,10.366 26.356,10.534 26.396,10.734 26.355,10.934 26.355,10.934 26.318,11.112 26.352,11.291 26.452,11.443 26.603,11.546 26.603,11.546 42.113,18.124 42.162,18.158 42.194,18.207 42.204,18.265 42.191,18.323 42.191,18.323 41.848,19.094 41.814,19.142 41.764,19.173 41.705,19.182 41.648,19.169 41.648,19.169 24.543,11.187 24.487,11.141 24.459,11.074 24.465,11.002 24.465,11.002 26.052,6.393 26.092,6.332 26.155,6.296 26.228,6.295 26.228,6.295 44.62,10.536 44.674,10.56 44.714,10.604 44.735,10.659 44.732,10.718
  Layer 2 region: 43.615,14.615 43.586,14.666 43.539,14.703 43.482,14.718 43.423,14.71 43.423,14.71 27.637,9.269 27.579,9.262 27.522,9.276 27.476,9.312 27.446,9.362 27.446,9.362 27.392,9.52 27.384,9.578 27.399,9.635 27.435,9.681 27.485,9.711 27.485,9.711 43.275,15.142 43.326,15.172 43.361,15.22 43.376,15.277 43.367,15.335 43.367,15.335 43.078,16.128 43.047,16.178 43,16.213 42.942,16.227 42.884,16.217 42.884,16.217 26.447,9.902 26.385,9.858 26.353,9.789 26.359,9.713 26.359,9.713 26.751,8.574 26.793,8.511 26.861,8.476 26.937,8.48 26.937,8.48 43.777,13.623 43.829,13.651 43.866,13.697 43.882,13.754 43.875,13.813 43.875,13.813
  Layer 2 region: 44.331,12.273 44.098,13.084 44.071,13.136 44.026,13.174 43.969,13.192 43.91,13.186 43.91,13.186 27.941,8.299 27.876,8.258 27.839,8.191 27.841,8.114 27.841,8.114 27.91,7.873 27.949,7.807 28.016,7.769 28.093,7.769 28.093,7.769 44.225,12.087 44.278,12.113 44.317,12.158 44.336,12.214 44.331,12.273
  Layer 2 region: 42.805,16.84 42.489,17.622 42.457,17.671 42.407,17.704 42.349,17.715 42.291,17.703 42.291,17.703 26.921,11.174 26.86,11.127 26.831,11.056 26.84,10.979 26.84,10.979 26.934,10.747 26.98,10.685 27.051,10.655 27.127,10.663 27.127,10.663 42.72,16.643 42.77,16.675 42.804,16.724 42.816,16.781 42.805,16.84
  Layer 2 region: 41.526,19.785 41.156,20.542 41.121,20.59 41.069,20.619 41.01,20.626 40.954,20.61 40.954,20.61 26.076,13.024 26.018,12.973 25.994,12.9 26.009,12.825 26.009,12.825 26.119,12.599 26.169,12.541 26.241,12.516 26.317,12.529 26.317,12.529 41.455,19.583 41.502,19.618 41.533,19.669 41.541,19.727 41.526,19.785
  Layer 2 region: 11.907,45.902 11.96,45.876 11.999,45.832 12.018,45.777 12.014,45.718 12.014,45.718 7.318,28.214 7.28,28.147 7.214,28.108 7.137,28.107 7.137,28.107 6.894,28.168 6.826,28.205 6.786,28.27 6.784,28.347 6.784,28.347 10.607,44.93 10.611,45.048 10.569,45.157 10.489,45.242 10.382,45.29 10.382,45.29 9.661,45.45 8.937,45.598 8.937,45.598 8.819,45.597 8.711,45.552 8.629,45.469 8.584,45.36 8.584,45.36 5.333,28.658 5.333,28.6 5.356,28.546 5.397,28.504 5.452,28.482 5.452,28.482 5.615,28.45 5.674,28.451 5.728,28.473 5.769,28.515 5.791,28.569 5.791,28.569 8.972,44.961 8.995,45.016 9.037,45.057 9.092,45.08 9.151,45.079 9.151,45.079 9.976,44.904 10.03,44.88 10.071,44.837 10.092,44.782 10.091,44.723 10.091,44.723 6.125,27.568 6.09,27.5 6.026,27.459 5.95,27.454 5.95,27.454 4.768,27.684 4.699,27.717 4.656,27.779 4.648,27.855 4.648,27.855 7.62,46.652 7.64,46.707 7.68,46.75 7.734,46.774 7.793,46.776 7.793,46.776 9.859,46.385 11.907,45.902
  Layer 2 region: 13.936,46.878 13.988,46.85 14.025,46.805 14.042,46.749 14.036,46.69 14.036,46.69 7.662,25.861 7.625,25.799 7.563,25.762 7.49,25.758 7.49,25.758 2.705,26.688 2.639,26.719 2.595,26.777 2.584,26.849 2.584,26.849 4.223,45.652 4.24,45.709 4.277,45.755 4.33,45.783 4.389,45.789 4.389,45.789 5.227,45.7 5.284,45.683 5.329,45.645 5.356,45.592 5.36,45.533 5.36,45.533 3.303,28.811 3.316,28.63 3.398,28.467 3.536,28.348 3.709,28.291 3.709,28.291 3.902,28.227 4.055,28.092 4.143,27.908 4.151,27.704 4.151,27.704 4.141,27.635 4.155,27.484 4.243,27.36 4.38,27.294 4.38,27.294 6.164,26.947 6.315,26.957 6.443,27.04 6.513,27.174 6.513,27.174 6.529,27.242 6.614,27.427 6.764,27.565 6.956,27.633 7.159,27.621 7.159,27.621 7.341,27.609 7.513,27.667 7.65,27.787 7.731,27.951 7.731,27.951 12.541,45.922 12.548,46.038 12.511,46.149 12.433,46.237 12.328,46.289 12.328,46.289 9.959,46.856 7.565,47.301 7.565,47.301 7.448,47.297 7.342,47.248 7.262,47.162 7.221,47.052 7.221,47.052 4.329,28.824 4.298,28.754 4.236,28.708 4.16,28.699 4.16,28.699 3.912,28.734 3.841,28.764 3.794,28.825 3.784,28.901 3.784,28.901 6.168,48.363 6.186,48.418 6.225,48.463 6.277,48.489 6.336,48.493 6.336,48.493 10.168,47.837 13.936,46.878
  Layer 2 region: 17.815,47.465 17.865,47.434 17.899,47.387 17.912,47.329 17.902,47.271 17.902,47.271 9.034,24.188 8.995,24.131 8.934,24.097 8.865,24.094 8.865,24.094 0.806,25.661 0.743,25.689 0.7,25.743 0.685,25.811 0.685,25.811 1.029,45.836 1.041,45.894 1.075,45.942 1.125,45.973 1.184,45.983 1.184,45.983 2.027,45.954 2.084,45.94 2.132,45.905 2.163,45.854 2.171,45.796 2.171,45.796 1.285,28.972 1.311,28.791 1.404,28.635 1.55,28.526 1.726,28.481 1.726,28.481 1.924,28.43 2.085,28.306 2.186,28.129 2.209,27.926 2.209,27.926 2.094,26.615 2.116,26.472 2.204,26.356 2.335,26.295 2.335,26.295 7.685,25.255 7.83,25.262 7.954,25.337 8.029,25.462 8.029,25.462 8.413,26.72 8.511,26.899 8.67,27.026 8.867,27.081 9.069,27.054 9.069,27.054 9.249,27.029 9.425,27.076 9.57,27.186 9.662,27.343 9.662,27.343 16.264,46.534 16.279,46.65 16.249,46.763 16.178,46.856 16.077,46.915 16.077,46.915 10.311,48.51 4.395,49.398 4.395,49.398 4.278,49.386 4.176,49.329 4.102,49.238 4.069,49.126 4.069,49.126 2.308,29.056 2.282,28.984 2.223,28.934 2.148,28.919 2.148,28.919 1.898,28.937 1.825,28.962 1.774,29.019 1.758,29.094 1.758,29.094 2.872,50.466 2.887,50.523 2.922,50.57 2.973,50.6 3.031,50.608 3.031,50.608 10.541,49.591 17.815,47.465
  Layer 2 region: 14.615,43.615 13.813,43.875 13.754,43.882 13.697,43.866 13.651,43.829 13.623,43.777 13.623,43.777 8.745,27.805 8.742,27.728 8.777,27.66 8.842,27.618 8.842,27.618 9.08,27.541 9.157,27.536 9.226,27.571 9.269,27.634 9.269,27.634 14.71,43.423 14.718,43.482 14.703,43.539 14.666,43.586 14.615,43.615
  Layer 2 region: 26.888,39.061 26.929,39.019 26.951,38.964 26.949,38.906 26.926,38.852 26.926,38.852 16.527,24.009 16.468,23.96 16.392,23.946 16.32,23.971 16.32,23.971 16.112,24.111 16.061,24.169 16.046,24.244 16.07,24.317 16.07,24.317 25.335,38.593 25.378,38.702 25.377,38.819 25.33,38.926 25.246,39.008 25.246,39.008 24.623,39.405 23.993,39.791 23.993,39.791 23.883,39.831 23.766,39.825 23.66,39.776 23.581,39.689 23.581,39.689 14.813,25.106 14.793,25.051 14.796,24.992 14.821,24.939 14.864,24.9 14.864,24.9 15.007,24.814 15.062,24.794 15.121,24.797 15.173,24.822 15.213,24.866 15.213,24.866 23.809,39.181 23.849,39.224 23.902,39.249 23.961,39.251 24.017,39.231 24.017,39.231 24.732,38.784 24.775,38.743 24.799,38.689 24.8,38.63 24.778,38.575 24.778,38.575 15.184,23.81 15.128,23.759 15.054,23.742 14.981,23.763 14.981,23.763 13.949,24.384 13.896,24.438 13.876,24.511 13.895,24.585 13.895,24.585 23.116,41.232 23.154,41.277 23.207,41.304 23.265,41.308 23.321,41.29 23.321,41.29 25.129,40.215 26.888,39.061
  Layer 2 region: 29.128,39.284 29.168,39.241 29.188,39.185 29.184,39.126 29.159,39.073 29.159,39.073 16.045,21.681 15.989,21.636 15.918,21.622 15.848,21.643 15.848,21.643 11.669,24.154 11.618,24.205 11.597,24.275 11.611,24.346 11.611,24.346 19.583,41.455 19.618,41.502 19.669,41.533 19.727,41.541 19.785,41.526 19.785,41.526 20.542,41.156 20.59,41.121 20.619,41.069 20.626,41.01 20.61,40.954 20.61,40.954 12.957,25.944 12.908,25.769 12.929,25.588 13.018,25.429 13.161,25.317 13.161,25.317 13.321,25.19 13.418,25.011 13.438,24.808 13.376,24.614 13.376,24.614 13.343,24.553 13.305,24.405 13.344,24.259 13.45,24.15 13.45,24.15 15.009,23.214 15.154,23.171 15.302,23.205 15.415,23.308 15.415,23.308 15.453,23.366 15.595,23.511 15.784,23.589 15.987,23.588 16.174,23.506 16.174,23.506 16.341,23.433 16.523,23.429 16.693,23.495 16.824,23.621 16.824,23.621 27.491,38.863 27.538,38.97 27.54,39.087 27.498,39.196 27.416,39.281 27.416,39.281 25.384,40.624 23.287,41.861 23.287,41.861 23.175,41.897 23.059,41.888 22.954,41.834 22.879,41.745 22.879,41.745 13.926,25.605 13.873,25.55 13.8,25.528 13.725,25.545 13.725,25.545 13.503,25.663 13.447,25.715 13.424,25.789 13.44,25.864 13.44,25.864 22.337,43.336 22.373,43.383 22.424,43.411 22.483,43.418 22.539,43.402 22.539,43.402 25.916,41.474 29.128,39.284
  Layer 2 region: 32.975,38.51 33.011,38.464 33.027,38.407 33.02,38.349 32.99,38.297 32.99,38.297 16.762,19.639 16.706,19.599 16.637,19.588 16.571,19.609 16.571,19.609 9.534,23.837 9.485,23.886 9.462,23.951 9.471,24.02 9.471,24.02 16.643,42.72 16.675,42.77 16.724,42.804 16.781,42.816 16.84,42.805 16.84,42.805 17.622,42.489 17.671,42.457 17.704,42.407 17.715,42.349 17.703,42.291 17.703,42.291 11.116,26.785 11.079,26.607 11.113,26.428 11.213,26.276 11.363,26.173 11.363,26.173 11.531,26.058 11.641,25.886 11.675,25.685 11.627,25.487 11.627,25.487 11.07,24.294 11.043,24.152 11.085,24.013 11.188,23.91 11.188,23.91 15.859,21.103 15.998,21.061 16.14,21.089 16.253,21.18 16.253,21.18 17.045,22.231 17.197,22.366 17.391,22.431 17.594,22.415 17.775,22.321 17.775,22.321 17.936,22.236 18.117,22.219 18.291,22.273 18.431,22.39 18.431,22.39 31.198,38.165 31.253,38.269 31.263,38.385 31.228,38.497 31.153,38.587 31.153,38.587 26.28,42.058 21.025,44.916 21.025,44.916 20.911,44.944 20.796,44.926 20.695,44.866 20.626,44.771 20.626,44.771 12.106,26.514 12.057,26.455 11.985,26.428 11.909,26.441 11.909,26.441 11.68,26.543 11.62,26.591 11.592,26.662 11.603,26.738 11.603,26.738 19.959,46.44 19.993,46.489 20.042,46.521 20.1,46.531 20.157,46.519 20.157,46.519 26.866,42.995 32.975,38.51
  Layer 2 region: 28.65,35.986 27.986,36.505 27.933,36.532 27.874,36.536 27.818,36.517 27.774,36.477 27.774,36.477 17.727,23.137 17.698,23.066 17.708,22.99 17.755,22.929 17.755,22.929 17.952,22.774 18.023,22.744 18.099,22.753 18.161,22.798 18.161,22.798 28.675,35.773 28.702,35.826 28.707,35.885 28.689,35.941 28.65,35.986
  Layer 2 region: 39.231,24.017 38.784,24.732 38.743,24.775 38.689,24.799 38.63,24.8 38.575,24.778 38.575,24.778 24.571,15.679 24.52,15.622 24.503,15.547 24.526,15.473 24.526,15.473 24.659,15.261 24.715,15.208 24.789,15.19 24.863,15.211 24.863,15.211 39.181,23.809 39.224,23.849 39.249,23.902 39.251,23.961 39.231,24.017
  Layer 2 region: 44.157,24.909 44.176,24.853 44.171,24.795 44.144,24.742 44.099,24.704 44.099,24.704 22.468,12.722 22.401,12.703 22.333,12.716 22.279,12.759 22.279,12.759 17.112,19.139 17.082,19.201 17.083,19.271 17.115,19.332 17.115,19.332 30.251,34.451 30.298,34.487 30.355,34.502 30.413,34.494 30.464,34.464 30.464,34.464 31.091,33.9 31.126,33.852 31.14,33.795 31.131,33.736 31.1,33.686 31.1,33.686 19.607,21.368 19.511,21.213 19.482,21.033 19.523,20.856 19.63,20.708 19.63,20.708 19.748,20.542 19.792,20.343 19.755,20.143 19.643,19.973 19.643,19.973 18.712,19.043 18.637,18.918 18.629,18.773 18.691,18.642 18.691,18.642 22.12,14.407 22.236,14.319 22.38,14.296 22.517,14.344 22.517,14.344 23.62,15.061 23.81,15.136 24.014,15.13 24.199,15.046 24.337,14.895 24.337,14.895 24.459,14.761 24.624,14.683 24.806,14.674 24.977,14.736 24.977,14.736 42.37,25.193 42.457,25.272 42.506,25.378 42.512,25.495 42.472,25.605 42.472,25.605 39.08,30.533 35.119,35.016 35.119,35.016 35.022,35.081 34.907,35.104 34.792,35.082 34.695,35.017 34.695,35.017 20.445,20.775 20.378,20.736 20.302,20.735 20.234,20.773 20.234,20.773 20.054,20.947 20.014,21.013 20.012,21.09 20.048,21.157 20.048,21.157 34.639,36.813 34.687,36.847 34.744,36.861 34.802,36.851 34.852,36.82 34.852,36.82 39.951,31.213 44.157,24.909
  Layer 2 region: 40.808,26.953 40.83,26.898 40.829,26.839 40.806,26.785 40.764,26.744 40.764,26.744 22.493,14.886 22.424,14.862 22.353,14.874 22.295,14.917 22.295,14.917 19.227,18.706 19.196,18.772 19.2,18.844 19.237,18.906 19.237,18.906 32.58,32.257 32.629,32.29 32.688,32.301 32.745,32.289 32.794,32.255 32.794,32.255 33.38,31.648 33.412,31.599 33.422,31.54 33.409,31.483 33.374,31.435 33.374,31.435 21.049,19.948 20.943,19.8 20.901,19.623 20.931,19.443 21.027,19.288 21.027,19.288 21.133,19.115 21.163,18.913 21.112,18.716 20.988,18.554 20.988,18.554 20.935,18.508 20.85,18.383 20.836,18.232 20.899,18.093 20.899,18.093 22.043,16.681 22.165,16.591 22.316,16.572 22.457,16.63 22.457,16.63 22.512,16.672 22.696,16.76 22.9,16.768 23.091,16.697 23.239,16.557 23.239,16.557 23.37,16.431 23.54,16.365 23.722,16.369 23.888,16.442 23.888,16.442 39.125,27.117 39.206,27.202 39.248,27.311 39.245,27.428 39.198,27.535 39.198,27.535 37.748,29.492 36.2,31.372 36.2,31.372 36.107,31.444 35.994,31.475 35.878,31.46 35.777,31.402 35.776,31.402 21.844,19.298 21.775,19.264 21.698,19.269 21.634,19.311 21.634,19.311 21.466,19.497 21.431,19.565 21.435,19.642 21.475,19.707 21.475,19.707 35.811,33.083 35.862,33.114 35.92,33.124 35.977,33.11 36.024,33.075 36.024,33.075 38.538,30.109 40.808,26.953
  Layer 2 region: 38.626,27.509 38.65,27.456 38.652,27.397 38.631,27.342 38.59,27.3 38.59,27.3 23.742,16.909 23.669,16.882 23.594,16.895 23.534,16.944 23.534,16.944 23.387,17.147 23.359,17.218 23.37,17.294 23.418,17.354 23.418,17.354 37.007,27.6 37.085,27.688 37.123,27.798 37.116,27.915 37.065,28.021 37.065,28.021 36.615,28.607 36.155,29.185 36.155,29.185 36.065,29.26 35.954,29.295 35.837,29.285 35.733,29.23 35.733,29.23 22.506,18.525 22.469,18.48 22.452,18.425 22.457,18.366 22.484,18.314 22.484,18.314 22.589,18.185 22.634,18.148 22.69,18.13 22.748,18.136 22.8,18.163 22.8,18.163 35.773,28.675 35.826,28.702 35.885,28.707 35.941,28.689 35.986,28.65 35.986,28.65 36.505,27.986 36.532,27.933 36.536,27.874 36.517,27.818 36.477,27.774 36.477,27.774 22.412,17.181 22.342,17.152 22.266,17.161 22.205,17.206 22.205,17.206 21.447,18.143 21.416,18.212 21.423,18.287 21.465,18.35 21.465,18.35 35.824,30.839 35.875,30.869 35.934,30.876 35.991,30.86 36.037,30.824 36.037,30.824 37.368,29.195 38.626,27.509
  Layer 2 region: -45.079,-9.151 -44.904,-9.976 -44.88,-10.03 -44.837,-10.071 -44.782,-10.092 -44.723,-10.091 -44.723,-10.091 -28.452,-6.329 -28.384,-6.293 -28.343,-6.229 -28.339,-6.152 -28.339,-6.152 -28.391,-5.906 -28.426,-5.838 -28.49,-5.796 -28.566,-5.79 -28.566,-5.79 -44.961,-8.972 -45.016,-8.995 -45.057,-9.037 -45.08,-9.092 -45.079,-9.151
  Layer 2 region: -50.014,-8.304 -50.012,-8.246 -49.987,-8.192 -49.944,-8.152 -49.889,-8.132 -49.889,-8.132 -25.464,-4.27 -25.395,-4.275 -25.336,-4.311 -25.299,-4.37 -25.299,-4.37 -22.626,-12.132 -22.619,-12.201 -22.644,-12.266 -22.695,-12.312 -22.695,-12.312 -40.209,-22.027 -40.266,-22.045 -40.325,-22.04 -40.377,-22.012 -40.414,-21.966 -40.414,-21.966 -40.81,-21.222 -40.827,-21.165 -40.821,-21.106 -40.792,-21.054 -40.746,-21.018 -40.746,-21.018 -25.732,-13.373 -25.589,-13.26 -25.5,-13.102 -25.479,-12.921 -25.529,-12.745 -25.529,-12.745 -25.583,-12.549 -25.557,-12.347 -25.453,-12.171 -25.289,-12.05 -25.289,-12.05 -24.096,-11.494 -23.984,-11.403 -23.927,-11.269 -23.939,-11.125 -23.939,-11.125 -25.714,-5.972 -25.793,-5.85 -25.92,-5.78 -26.065,-5.777 -26.065,-5.777 -27.347,-6.074 -27.551,-6.079 -27.74,-6.005 -27.886,-5.862 -27.964,-5.673 -27.964,-5.673 -28.033,-5.505 -28.161,-5.376 -28.329,-5.305 -28.511,-5.304 -28.511,-5.304 -48.431,-9.182 -48.54,-9.227 -48.623,-9.309 -48.668,-9.417 -48.668,-9.534 -48.668,-9.534 -47.166,-15.325 -44.978,-20.893 -44.978,-20.893 -44.908,-20.988 -44.808,-21.048 -44.693,-21.066 -44.579,-21.039 -44.579,-21.039 -26.317,-12.529 -26.241,-12.516 -26.169,-12.541 -26.119,-12.599 -26.119,-12.599 -26.009,-12.825 -25.994,-12.9 -26.018,-12.973 -26.076,-13.024 -26.076,-13.024 -45.141,-22.745 -45.198,-22.761 -45.256,-22.754 -45.307,-22.725 -45.343,-22.679 -45.343,-22.679 -48.217,-15.667 -50.014,-8.304
  Layer 2 region: -47.565,-11.37 -47.567,-11.311 -47.547,-11.256 -47.507,-11.213 -47.453,-11.189 -47.453,-11.189 -26.228,-6.295 -26.155,-6.296 -26.092,-6.332 -26.052,-6.393 -26.052,-6.393 -24.465,-11.002 -24.459,-11.074 -24.487,-11.141 -24.543,-11.187 -24.543,-11.187 -41.648,-19.169 -41.705,-19.182 -41.764,-19.173 -41.814,-19.142 -41.848,-19.094 -41.848,-19.094 -42.191,-18.323 -42.204,-18.265 -42.194,-18.207 -42.162,-18.158 -42.113,-18.124 -42.113,-18.124 -26.603,-11.546 -26.452,-11.443 -26.352,-11.291 -26.318,-11.112 -26.355,-10.934 -26.355,-10.934 -26.396,-10.734 -26.356,-10.534 -26.24,-10.366 -26.068,-10.257 -26.068,-10.257 -26.003,-10.232 -25.88,-10.143 -25.815,-10.006 -25.827,-9.854 -25.827,-9.854 -26.419,-8.136 -26.503,-8.009 -26.638,-7.94 -26.79,-7.946 -26.79,-7.946 -26.857,-7.967 -27.06,-7.986 -27.254,-7.925 -27.409,-7.793 -27.5,-7.61 -27.5,-7.61 -27.58,-7.447 -27.717,-7.327 -27.89,-7.268 -28.071,-7.28 -28.071,-7.28 -46.04,-12.1 -46.145,-12.152 -46.222,-12.24 -46.259,-12.351 -46.252,-12.468 -46.252,-12.468 -45.558,-14.803 -44.747,-17.099 -44.747,-17.099 -44.684,-17.198 -44.589,-17.266 -44.475,-17.292 -44.359,-17.272 -44.359,-17.272 -27.127,-10.663 -27.051,-10.655 -26.98,-10.685 -26.934,-10.747 -26.934,-10.747 -26.84,-10.979 -26.831,-11.056 -26.86,-11.127 -26.921,-11.174 -26.921,-11.174 -44.967,-18.84 -45.025,-18.852 -45.082,-18.841 -45.131,-18.808 -45.164,-18.759 -45.164,-18.759 -46.512,-15.113 -47.565,-11.37